# Altium PCB node_simple.PcbDoc
Units mil, origin at the board's own origin, x right, y up, seen from the top; angles counter-clockwise.
Board outline 6000 x 4000 mil, 2 copper layers (Top Layer, Bottom Layer); 11 components, 7 nets, 32 pads, 0 vias.
Unrouted connection lines stored in the file: 21.
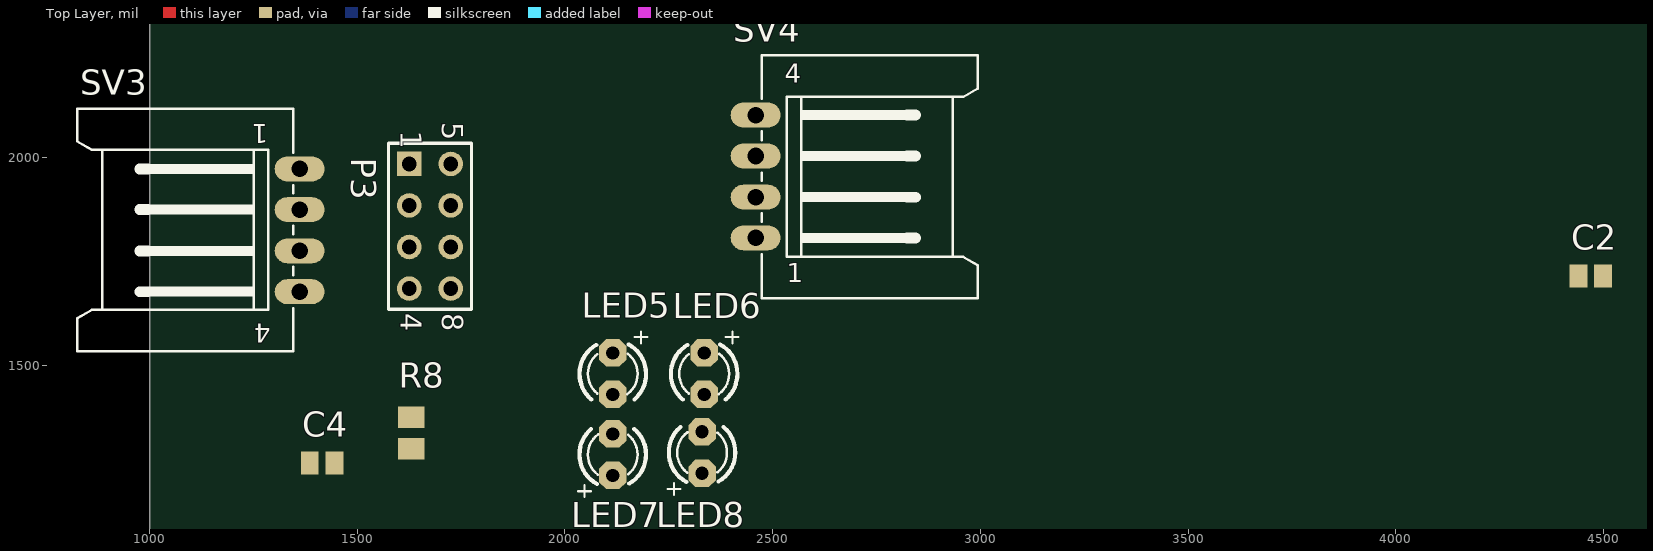
[diagram p0: Top Layer view]
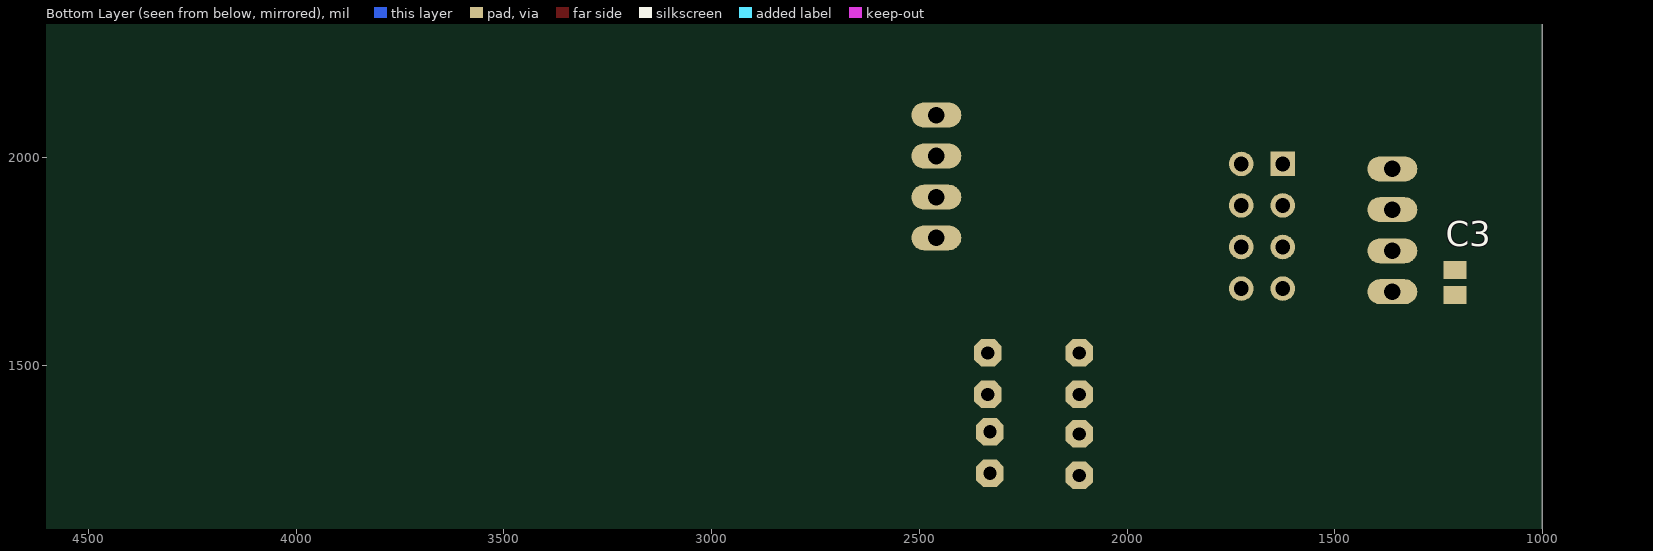
[diagram p1: Bottom Layer view, seen from below]

## Layer stack, top to bottom
Top Solder: solder mask 0.4, Solder Resist, Dk 3.5
Top Layer: signal copper 1.4
Dielectric 1: dielectric 12.6, FR-4, Dk 4.8
Bottom Layer: signal copper 1.4
Bottom Solder: solder mask 0.4, Solder Resist, Dk 3.5

## Board outline
1000,1000 7000,1000 7000,5000 1000,5000

## Design rules (kind name [scope] priority, off if disabled: settings)
Clearance [All] p1: gap=10
PolygonConnect [All] p1: connectstyle=Relief reliefconductorwidth=10 reliefentries=4 polygonreliefangle="90 Angle" airgapwidth=10
RoutingVias [All] p1: holewidth=28 width=50 viastyle="Through Hole" minholewidth=28 minwidth=50 maxholewidth=28 maxwidth=50
SolderMaskExpansion [All] p1: expansion=4
UnpouredPolygon [All] p1: allowunpoured=FALSE
Width [All] p1: maxlimit=10 minlimit=10 preferedwidth=10
29 further rules are at their usual default settings.

## Components (designator, comment, footprint, x,y, rotation, side; value= is the part's Value field where it differs from the comment)
C2 "Cap Pol3" C0805 4470,1715 r0 top
C3 "Cap Pol3" C0805 1210,1699.53 r270 bottom
C4 "Cap Pol3" C0805 1415,1265 r0 top
LED5 "3mmLED" LED3MM 2115,1480 r270 top
LED6 "3mmLED" LED3MM 2335,1480 r270 top
LED7 "3mmLED" LED3MM 2115,1285 r90 top
LED8 "3mmLED" LED3MM 2330,1290 r90 top
P3 "Header 4X2A" HDR2X4_CEN 1625,1985 r270 top
R8 "110" M0805 1630,1337.6 r270 top
SV3 "IN_HD" L04P 1115,1825 r90 top
SV4 "OUT_HD" L04P 2705,1955 r270 top

## Footprints (in the part's own frame and the unit in brackets; to place one, negate y for a bottom-side part, rotate by r counter-clockwise, add the part's x,y. Pads: shape width x height; smd on the part's side, far side on the other; paste and mask are expansions set on the pad)
C0805 [mm] "Chip Capacitor, Body 2.0x1.3mm, IPC High Density"
  rect 1.1x1.4 smd: 1(-0.75,0) 2(0.75,0)
  body extent -1.1,-0.72 1.1,0.72, height 1.4
HDR2X4_CEN [mm] "Connector; Header; 4x2 Position"
  rect 1.5x1.5 hole 0.9: 1(0,0)
  round 1.5 hole 0.9: 2(2.54,0) 3(5.08,0) 4(7.62,0) 5(0,2.54) 6(2.54,2.54) 7(5.08,2.54) 8(7.62,2.54)
  silkscreen extent -1.27,-1.27 8.89,3.81
L04P [mil]
  oval 60x120 hole 40: 1(148,-246.06) 2(50,-246.06) 3(-49.21,-246.06) 4(-147.64,-246.06)
  silkscreen extent -291,-231 293,289
LED3MM [mil]
  oct 66x66 hole 32: A(-50,0) K(50,0)
  silkscreen extent -102,-80 62,83
M0805 [mil]
  rect 52x63 smd: 1(-37.4,0) 2(38,0)

## Part data
C2 C3 C4: "Polarized Capacitor (Surface Mount)"
LED5 LED6 LED7 LED8: library part LED3MM
P3: "Header, 4-Pin, Dual row"
R8: library part R-US_M0805, "R-M0805"
SV3 SV4: library part L04P

## Nets (pads, with @x,y where several pads share a name; then routed paths per layer and width w, separated by ;. In a path a pad name is that pad's centre, name@x,y a point inside that pad or via, vN(x,y) a via of type N, cw(c..) or ccw(c..) an arc to the next point about the centre after c; other vN are vias at no path point)
GND: C2.2 C3.2 C4.2 R8.2 SV3.4 SV4.1
NetLED5_K: LED5.K LED6.K LED7.K LED8.K R8.1
NetP3_5: P3.5 P3.6 P3.7 P3.8
VCC: LED5.A LED6.A LED7.A LED8.A
VCC1: C2.1 SV3.1 SV4.4
VCC2: C3.1 SV3.2 SV4.3
VCC3: C4.1 SV3.3 SV4.2
pads on no net: P3.1 P3.2 P3.3 P3.4

## Text inside footprints (layer, text, board x,y; h text height)
P3: Top Overlay "8" at 1705,1625 h50 r270; Top Overlay "4" at 1605,1625 h50 r270; Top Overlay "1" at 1605,2065 h50 r270; Top Overlay "5" at 1705,2085 h50 r270
SV3: Top Overlay "1" at 1286.06,2096 h77.5 r180; Top Overlay "4" at 1291.06,1615.64 h77.5 r180
SV4: Top Overlay "1" at 2533.94,1684 h77.5; Top Overlay "4" at 2528.94,2164.36 h77.5